# EAGLE board main1 (EAGLE 7.5.0)
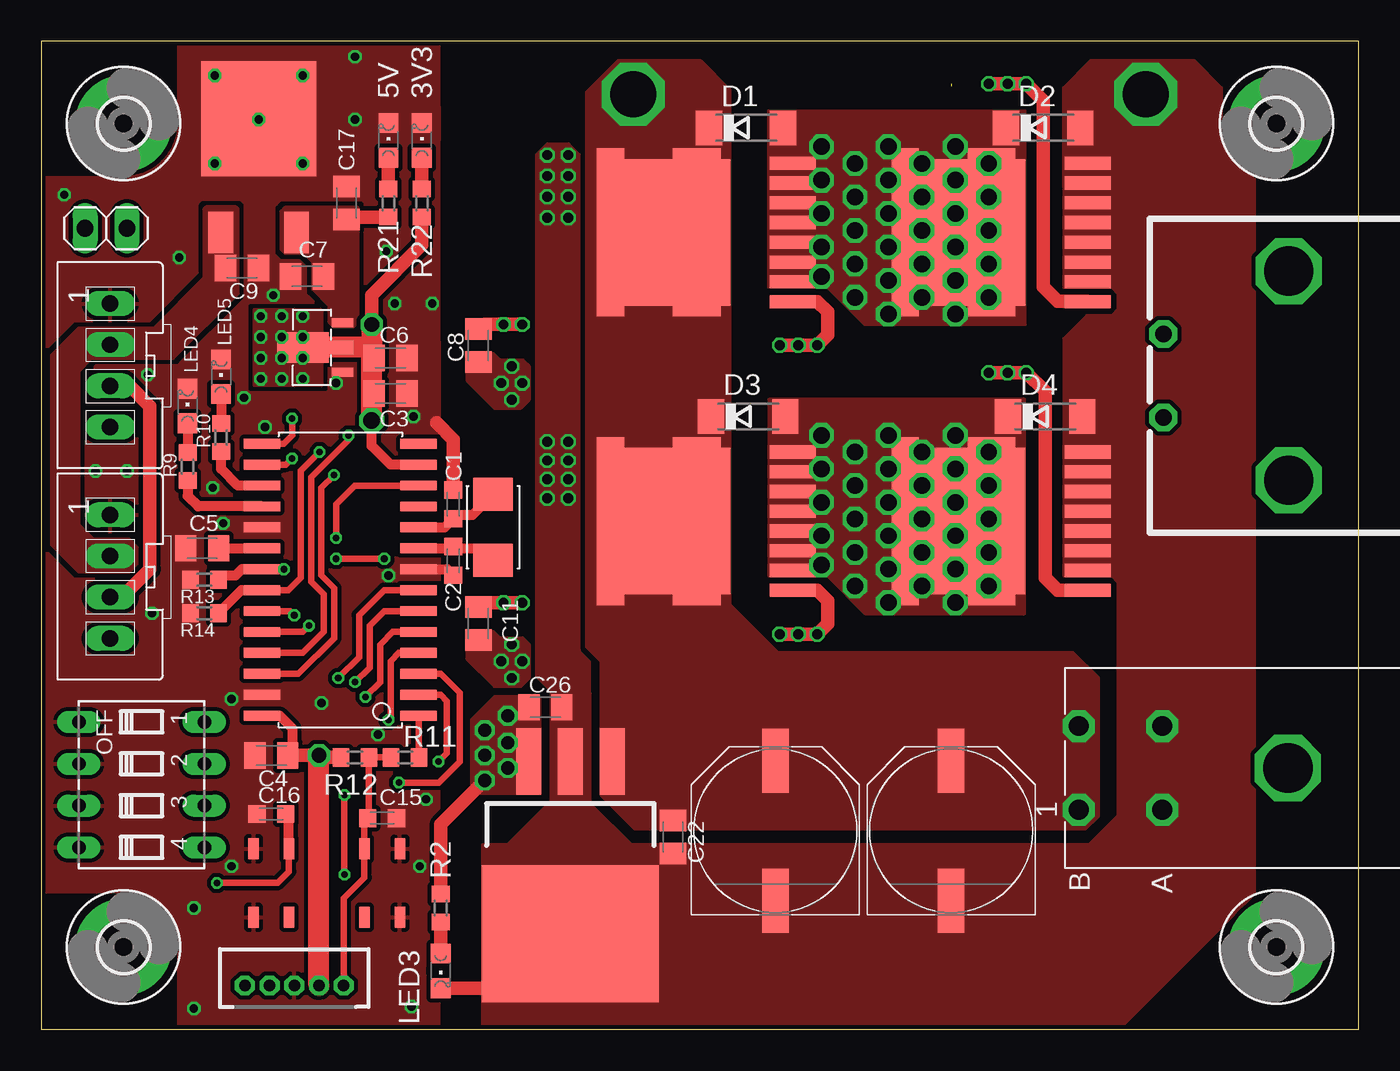
[diagram p0: board, top side]
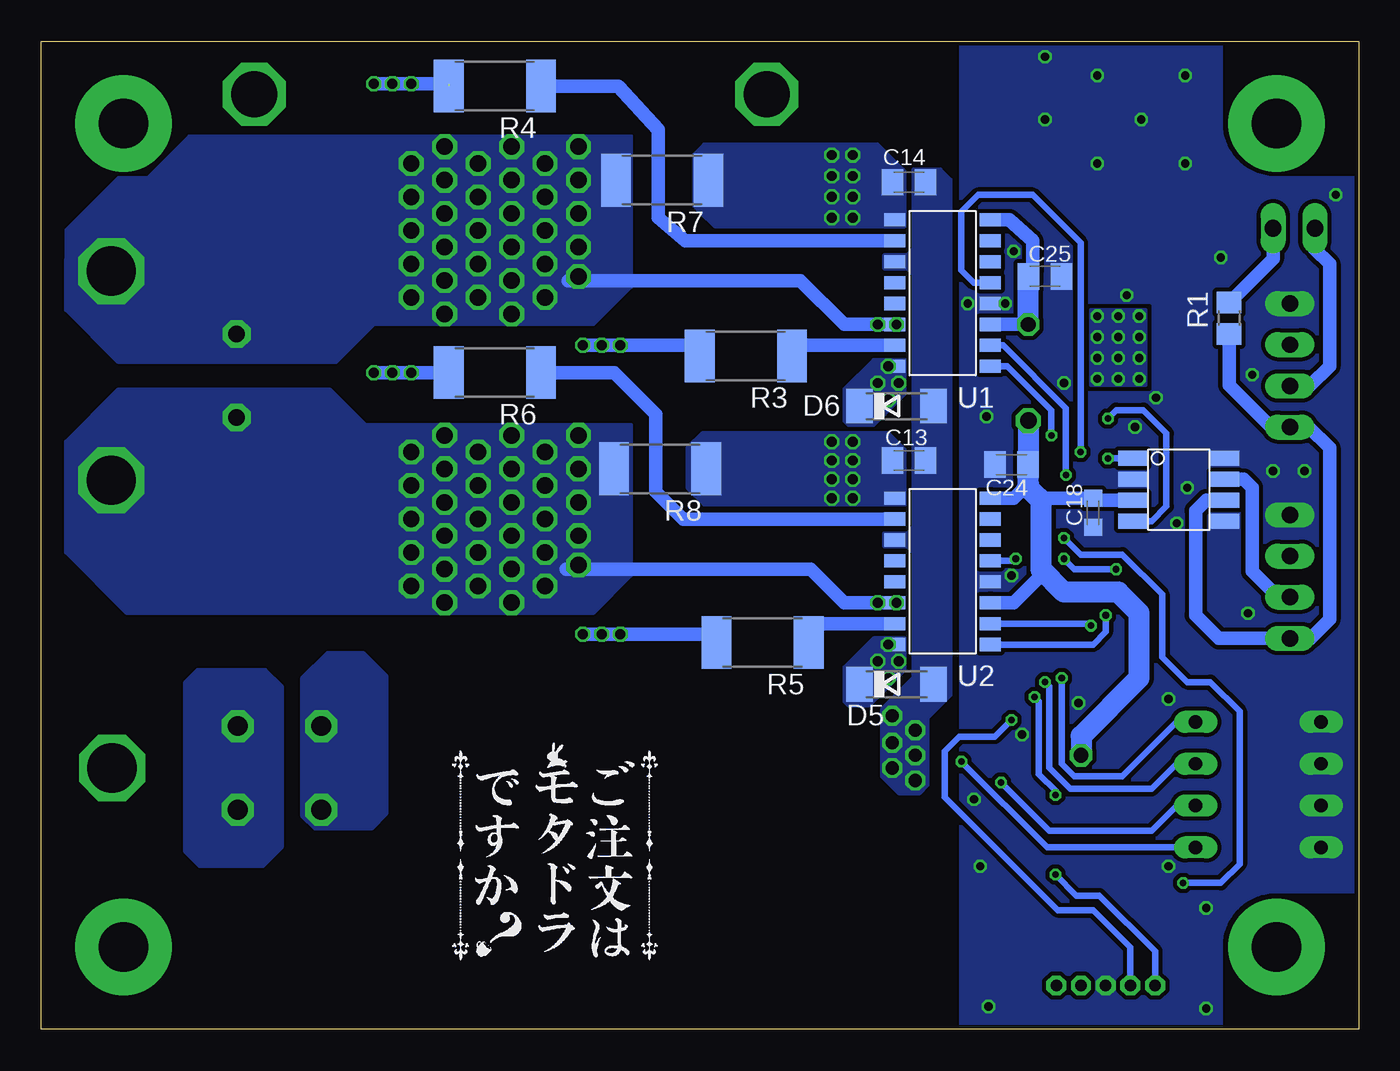
[diagram p1: board, bottom side, seen from below]

Size 80 x 60 mm. Coordinates in mm from the lower left corner, seen from the top.
Outline: 0,0 80,0 80,60 0,60 0,0
Copper layers (1*16): Top 0.035mm / dielectric 1.5mm / Bottom 0.035mm
Design rules "Elecrow_2-layer_eagle_rule": minimum track width 6mil, minimum drill 12mil, track to track 6mil, track to pad 6mil, pad to pad 6mil, via to via 6mil, smd to smd 0mil, copper to edge 10mil, drill to drill 10mil, minimum pad ring 10mil, minimum via ring 6mil, stop-mask expansion 2mil, vias tented up to drill 100mil, thermal gap 10mil
tRestrict: 19 lines
bRestrict: 10 lines

## Footprints (pad centres in the part's own frame; a part is rotated, then mirrored left to right if it is on the bottom)
CHIPLED_0805 = smd 1.2 x 1.2: A 0,-1.05; C 0,1.05
C0603K = smd 1.05 x 1.08: 1 -0.875,0; 2 0.875,0
C0805K = smd 1.3 x 1.6: 1 -1,0; 2 1,0
PANASONIC_G = smd 3.9 x 1.6: + 4.25,0; - -4.25,0
XA04 = drill 1 long: PIN1 0,0; PIN2 -2.5,0; PIN3 -5,0; PIN4 -7.5,0
SOD106-R = smd 1.6 x 2.1: A 2.25,0; C -2.25,0
3,0-PAD = drill 3 pad 5.842: B3,0 0,0
SOIC28 = smd 0.6 x 2.2: 1 -8.255,-4.75; 2 -6.985,-4.75; 3 -5.715,-4.75; 4 -4.445,-4.75; 5 -3.175,-4.75; 6 -1.905,-4.75; 7 -0.635,-4.75; 8 0.635,-4.75; 9 1.905,-4.75; 10 3.175,-4.75; 11 4.445,-4.75; 12 5.715,-4.75; 13 6.985,-4.75; 14 8.255,-4.75; 15 8.255,4.75; 16 6.985,4.75; 17 5.715,4.75; 18 4.445,4.75; 19 3.175,4.75; 20 1.905,4.75; 21 0.635,4.75; 22 -0.635,4.75; 23 -1.905,4.75; 24 -3.175,4.75; 25 -4.445,4.75; 26 -5.715,4.75; 27 -6.985,4.75; 28 -8.255,4.75
TO-252-2 = smd 1.5 x 2.5: 1 -2.3,0; 3 2.3,0 | smd 7 x 7: 2 0,6.9
SOT89 = smd 0.55 x 1.3: 1 -1.5,0; 3 1.5,0 | smd 0.8 x 1.475: 2 0,0.087 | smd 1.85 x 3.125: P 0,2.388
1X02 = drill 1.016 long: 1 -1.27,0; 2 1.27,0
TO-263-3 = smd 1.524 x 4.039: 1 -2.54,0; 2 0,0; 3 2.54,0 | smd 10.744 x 8.306: 4 0,10.452
NX5032GA = smd 2 x 2.4: 1 -2,0; 2 2,0
R0805 = smd 1.3 x 1.5: 1 -0.95,0; 2 0.95,0
R0603 = smd 1 x 1.1: 1 -0.85,0; 2 0.85,0
R2512 = smd 1.8 x 3.2: 1 -2.8,0; 2 2.8,0
DIP04S = drill 0.813 long: 1 -3.81,-3.81; 2 -1.27,-3.81; 3 1.27,-3.81; 4 3.81,-3.81; 5 3.81,3.81; 6 1.27,3.81; 7 -1.27,3.81; 8 -3.81,3.81
SKRP = smd 1.27 x 0.635: 1 -2.075,1.075; 2 2.075,1.075; 3 -2.075,-1.075; 4 2.075,-1.075
SOIC16_N = smd 0.8 x 1.27: P$1 -4.445,-2.9; P$2 -3.175,-2.9; P$3 -1.905,-2.9; P$4 -0.635,-2.9; P$5 0.635,-2.9; P$6 1.905,-2.9; P$7 3.175,-2.9; P$8 4.445,-2.9; P$9 4.445,2.9; P$10 3.175,2.9; P$11 1.905,2.9; P$12 0.635,2.9; P$13 -0.635,2.9; P$14 -1.905,2.9; P$15 -3.175,2.9; P$16 -4.445,2.9
D-3500D04 = drill 1.2 pad 1.93 octagon: 01A -2.54,-5.08; 01B -2.54,0; 02A 2.54,-5.08; 02B 2.54,0 | drill 3 pad 4 octagon: P$1 0,-12.7
MO-299A = smd 0.8 x 2.8: 1 -4.2,-5.24; 2 -3,-5.24; 3 -1.8,-5.24; 4 -0.6,-5.24; 5 0.6,-5.24; 6 1.8,-5.24; 7 3,-5.24; 8 4.2,-5.24 | smd 8.9 x 0.6: PAD1 0,-1.16 | smd 10.2 x 2.9: PAD2 0,0.59 | smd 8.9 x 2.95: PAD3 0,3.515 | smd 10.2 x 1.65: PAD4 0,5.824
SOIC8 = smd 0.9 x 1.75: 1 -1.905,-2.8; 2 -0.635,-2.8; 3 0.635,-2.8; 4 1.905,-2.8; 5 1.905,2.8; 6 0.635,2.8; 7 -0.635,2.8; 8 -1.905,2.8
ZH05 = drill 0.7 octagon: 1 3,0; 2 1.5,0; 3 0,0; 4 -1.5,0; 5 -3,0
D-3200S02-S = drill 1 pad 1.676 octagon: 1 -2.6,21.28; 2 2.48,21.28 | drill 3 pad 4 octagon: P$1 -6.41,13.66; P$2 6.29,13.66

## Placement (x,y rotation side)
3V3  [CHIPLED_0805]  23.11,53.98 0 top
5V  [CHIPLED_0805]  21.08,53.98 0 top
C1  22p  [C0603K]  25.02,31.88 270 top
C2  22p  [C0603K]  25.02,28.45 90 top
C3  0.1u  [C0805K]  21.21,38.61 0 top
C4  0.1u  [C0805K]  13.97,16.64 180 top
C5  4.7u  [C0805K]  9.78,29.21 180 top
C6  4.7u  [C0805K]  21.21,40.77 180 top
C7  4.7u  [C0805K]  16.13,45.72 0 top
C8  4.7u  [C0805K]  26.54,41.53 90 top
C9  4.7u  [C0805K]  12.19,46.23 180 top
C11  4.7u  [C0805K]  26.54,24.64 90 top
C12  [PANASONIC_G]  55.24,12.06 90 top
C13  0.1u  [C0805K]  27.3,34.54 180 bottom
C14  0.1u  [C0805K]  27.3,51.44 180 bottom
C15  0.1u  [C0603K]  20.7,12.83 0 top
C16  0.1u  [C0603K]  13.97,13.08 0 top
C17  4.7u  [C0805K]  18.54,50.16 270 top
C18  0.1u  [C0603K]  16.13,31.37 90 bottom
C21  [PANASONIC_G]  44.58,12.06 90 top
C22  4.7u  [C0805K]  38.35,11.68 270 top
C24  0.1u  [C0805K]  21.08,34.29 180 bottom
C25  0.1u  [C0805K]  19.05,45.72 0 bottom
C26  4.7u  [C0805K]  30.61,19.56 0 top
CN2  XA04-T  [XA04]  4.19,44.07 90 top
CN3  XA04-T  [XA04]  4.19,31.24 90 top
D1  SBD  [SOD106-R]  42.8,54.74 0 top
D2  SBD  [SOD106-R]  60.83,54.74 0 top
D3  SBD  [SOD106-R]  42.93,37.21 0 top
D4  SBD  [SOD106-R]  60.96,37.21 0 top
D5  [SOD106-R]  28.07,20.95 0 bottom
D6  [SOD106-R]  28.07,37.85 0 bottom
H5  MOUNT-PAD-ROUND3.0  [3,0-PAD]  5,55 0 top
H6  MOUNT-PAD-ROUND3.0  [3,0-PAD]  5,5 0 top
H7  MOUNT-PAD-ROUND3.0  [3,0-PAD]  75,55 0 top
H8  MOUNT-PAD-ROUND3.0  [3,0-PAD]  75,5 0 top
IC1  DSPIC33FJ32MC302/64MC202/64MC802/128MC202/128MC802  [SOIC28]  18.16,27.3 90 top
IC2  REGULATERNJM2845DL1  [TO-252-2]  13.21,48.39 0 top
IC4  REGULATERAZ1117CR  [SOT89]  18.29,41.4 90 top
JP3  [1X02]  3.94,48.64 180 top
LED3  [CHIPLED_0805]  24.26,3.56 180 top
LED4  [CHIPLED_0805]  8.89,37.85 0 top
LED5  [CHIPLED_0805]  10.92,39.62 0 top
MC7812BDTRKGOSCT-ND1  REGULATERMIC2940A-5.0WU  [TO-263-3]  32.13,16.26 180 top
Q2  CRYSTALNX5032GA  [NX5032GA]  27.43,30.48 270 top
R1  120  [R0805]  7.87,43.18 90 bottom
R2  1k  [R0603]  24.26,7.37 90 top
R3  33  [R2512]  37.21,40.89 180 bottom
R4  33  [R2512]  52.45,57.28 180 bottom
R5  33  [R2512]  36.2,23.5 180 bottom
R6  33  [R2512]  52.45,39.88 180 bottom
R7  470  [R2512]  42.29,51.56 180 bottom
R8  470  [R2512]  42.42,34.04 180 bottom
R9  510  [R0603]  8.89,34.16 90 top
R10  510  [R0603]  10.92,35.94 90 top
R11  330  [R0603]  22.1,16.51 0 top
R12  1k  [R0603]  19.05,16.51 180 top
R13  510  [R0603]  9.91,27.3 180 top
R14  510  [R0603]  9.91,25.27 180 top
R21  510  [R0603]  21.08,50.16 90 top
R22  510  [R0603]  23.11,50.16 90 top
S2  [DIP04S]  6.1,14.86 270 top
SW1  SWITCH_4PALPS  [SKRP]  20.7,8.89 270 top
SW2  SWITCH_4PALPS  [SKRP]  13.97,8.89 270 top
U1  [SOIC16_N]  25.27,44.7 90 bottom
U2  [SOIC16_N]  25.27,27.81 90 bottom
U$1  CN-D3500D04  [D-3500D04]  62.99,15.88 90 top
U$2  FET_NCHFDBL0065N40  [MO-299A]  40.39,48.39 90 top
U$3  FET_NCHFDBL0065N40  [MO-299A]  58.29,48.39 90 top
U$4  FET_NCHFDBL0065N40  [MO-299A]  40.39,30.86 90 top
U$5  FET_NCHFDBL0065N40  [MO-299A]  58.29,30.86 90 top
U$6  MAX3051  [SOIC8]  10.92,32.77 270 bottom
U$7  WRITE_FOR_PICT  [ZH05]  15.37,2.67 0 top
U$8  LOGOGOCHIUSA-14MM  [LOGO006]  55.24,3.81 0 bottom
U$9  CN-D3200S02  [D-3200S02-S]  89.41,39.75 90 top

## Library data of the parts
3V3 5V LED3-LED5 = led
C1-C9 C11 C13-C18 C22 C24-C26 = rp_c
C12 C21 = rcl
CN2 CN3 = rp_cn_xa
D1-D6 = diode
H5-H8 = holes
IC1 IC2 IC4 MC7812BDTRKGOSCT-ND1 Q2 SW1 SW2 U$1-U$9 = Syohei
JP3 = pinhead-2
R1-R14 R21 R22 = rp_r
S2 = switch-dil; OC_FARNELL: unknown; OC_NEWARK: unknown
U1 U2 = IC_module

## Nets
0V: C12.- C13.2 C14.2 C21.- C22.2 C26.2 D2.A D4.A LED3.C MC7812BDTRKGOSCT-ND1.2 MC7812BDTRKGOSCT-ND1.4 R7.1 R8.1 U1.P$9 U2.P$9 U$1.01A U$1.02A U$3.2 U$3.3 U$3.4 U$3.5 U$3.6 U$3.7 U$3.8 U$5.2 U$5.3 U$5.4 U$5.5 U$5.6 U$5.7 U$5.8
3.3V: C3.1 C4.1 C6.2 C18.2 C24.1 C25.1 IC1.13 IC1.28 IC4.2 IC4.P R12.2 R22.1 U1.P$3 U1.P$8 U2.P$3 U2.P$8 U$6.3 U$7.2
+5V: C7.2 C17.2 IC2.3 IC4.3 R21.1
+10V: C9.2 CN2.PIN2 CN3.PIN2 IC2.1
BOOTA: C8.1 D6.C U1.P$16
BOOTB: C11.1 D5.C U2.P$16
CANH: CN2.PIN3 CN3.PIN3 JP3.2 U$6.7
CANL: CN2.PIN4 CN3.PIN4 R1.1 U$6.6
CRXD: IC1.15 U$6.4
CTXD: IC1.16 U$6.1
DGND: 3V3.C 5V.C C1.1 C2.1 C3.2 C4.2 C5.2 C6.1 C7.1 C9.1 C15.2 C16.1 C17.1 C18.1 C24.2 C25.2 CN2.PIN1 CN3.PIN1 IC1.8 IC1.19 IC1.27 IC2.2 IC4.1 LED4.C LED5.C R13.2 R14.2 S2.1 S2.2 S2.3 S2.4 SW1.1 SW1.2 SW2.3 SW2.4 U1.P$4 U2.P$4 U$6.2 U$6.5 U$6.8 U$7.3
DIS_A: IC1.22 R14.1 U1.P$5
DIS_B: IC1.21 R13.1 U2.P$5
HA: R3.1 U1.P$15
HB: R5.1 U2.P$15
LA: R4.1 U1.P$10
LB: R6.1 U2.P$10
LED0: IC1.18 R9.1
LED1: IC1.17 R10.1
MCLR: C15.1 R11.1 R12.1 SW1.3 U$7.1
N$1: C2.2 IC1.9 Q2.2
N$2: C1.2 IC1.10 Q2.1
N$3: C5.1 IC1.20
N$4: JP3.1 R1.2
N$5: LED3.A R2.1
N$6: LED4.A R9.2
N$7: LED5.A R10.2
N$8: R3.2 U$2.1
N$9: R4.2 U$3.1
N$13: R6.2 U$5.1
N$15: R5.2 U$4.1
N$17: IC1.1 R11.2
N$21: 5V.A R21.2
N$22: 3V3.A R22.2
OUT+: C8.2 D1.A D2.C R7.2 U1.P$14 U$2.2 U$2.3 U$2.4 U$2.5 U$2.6 U$2.7 U$2.8 U$3.PAD1 U$3.PAD2 U$3.PAD3 U$3.PAD4 U$9.2 U$9.P$2
OUT-: C11.2 D3.A D4.C R8.2 U2.P$14 U$4.2 U$4.3 U$4.4 U$4.5 U$4.6 U$4.7 U$4.8 U$5.PAD1 U$5.PAD2 U$5.PAD3 U$5.PAD4 U$9.1 U$9.P$1
PGEC: IC1.5 U$7.5
PGED: IC1.4 U$7.4
PWMHA: IC1.25 U1.P$1
PWMHB: IC1.23 U2.P$1
PWMLA: IC1.26 U1.P$2
PWMLB: IC1.24 U2.P$2
SW: C16.2 IC1.12 SW2.1
SW0: IC1.7 S2.8
SW1: IC1.6 S2.7
SW2: IC1.3 S2.6
SW3: IC1.2 S2.5
VCC_1: C13.1 C14.1 C26.1 D5.A D6.A MC7812BDTRKGOSCT-ND1.3 R2.2 U1.P$11 U2.P$11
VDD: C12.+ C21.+ C22.1 D1.C D3.C MC7812BDTRKGOSCT-ND1.1 U$1.01B U$1.02B U$2.PAD1 U$2.PAD2 U$2.PAD3 U$2.PAD4 U$4.PAD1 U$4.PAD2 U$4.PAD3 U$4.PAD4

## Tracks (layer width: path | path; a pad name or v marks a point on that pad's centre or on a via)
0V  (via drill 0.6, 2.8)
  Top 0.813: LED3.C 27.91,2.51 28.07,2.67
  other vias: 67.06,56.77 30.73,32.26 32,32.26 30.73,33.4 32,33.4 32,34.54 30.73,34.54 30.73,49.28 32,49.28 32,50.55 30.73,50.55 32,51.82 30.73,51.82 30.73,35.69 32,35.69 30.73,53.09 32,53.09
  pour Top (isolate 0.254, rank 5, no thermals): 63.63,11.18 26.8,11.18 26.8,0 65.41,0 73.66,8.26 73.66,51.56 69.34,55.88 62.1,55.88 62.1,45.09 65.02,45.09 65.41,44.7 65.41,43.69 65.02,43.31 63.5,43.31 62.1,41.91 62.1,27.56 65.02,27.56 65.41,27.18 65.41,12.95
  pour Top (isolate 0.254, rank 4, no thermals): 30.99,20.45 33.27,20.45 33.27,13.72 35.94,11.05 28.19,11.05 30.99,13.84
  pour Top (isolate 0.254, rank 4, no thermals): 62.1,57.15 63.75,58.8 69.98,58.8 71.63,57.15 71.63,51.82 62.1,51.18
  pour Top (isolate 0.254, rank 6, no thermals): 33.27,19.68 33.27,22.35 32.64,22.99 32.64,53.09 32,53.72 30.73,53.72 30.1,53.09 30.1,21.46 30.99,20.57 30.99,19.56
  pour Bottom (isolate 0.254, rank 6, no thermals): 27.69,52.2 29.21,53.72 39.37,53.72 39.75,53.72 40.39,53.09 40.39,50.04 40.01,49.66 39.12,48.77 27.56,48.77 27.56,52.07
  pour Bottom (isolate 0.254, rank 6, no thermals): 27.56,35.18 28.57,36.2 39.88,36.2 40.77,35.31 40.77,32.89 39.75,31.88 27.56,31.88
  pour Bottom (isolate 0.254, rank 4, no thermals): 65.41,11.05 66.55,9.91 70.36,9.91 71.25,10.79 71.25,21.08 70.48,21.84 66.42,21.84 65.41,20.83
3.3V  (via drill 0.5, 0.9, 1)
  Top 0.254: IC4.P 16.64,41.4 IC4.2
  Top 0.406: 16.91,16.6 16.99,16.51
  Top 0.61: IC1.28 14.48,19.05 15.24,18.29 15.24,16.91 C4.1 | IC1.13 21.21,34.29 20.07,35.43 v20.07,36.96
  Top 0.813: 16.91,16.6 v16.87,16.64 C4.1 | C6.2 20.07,39.88 | C3.1 20.07,37.85 | 16.99,16.51 R12.2 | R22.1 23.11,47.62 20.07,44.58 v20.07,42.8
  Top 1.27: U$7.2 v16.87,16.64 | v20.07,36.96 20.07,37.85 20.07,39.88 20.07,41.4 | 20.07,41.4 16.64,41.4 | v20.07,42.8 20.07,41.4
  Bottom 0.813: U2.P$8 20.95,32.26 20.07,33.15 | U1.P$8 21.21,49.15 20.07,48.13 19.81,47.88 19.81,45.96 C25.1 20.07,45.48 | U1.P$3 v20.07,42.8 | U2.P$3 20.95,25.91 19.43,27.43 19.43,27.91 19.29,27.92 | C24.1 20.08,34.91 20.07,34.92 | 20.07,35.18 20.07,35.05 | 15.69,32.13 C18.2 | 19.43,32.26 19.37,32.32 19.3,32.24 C18.2 | U$6.3 16.13,32.13 C18.2
  Bottom 1.27: 20.07,35.05 20.07,34.92 20.07,33.15 20.07,32.89 19.43,32.26 19.29,32.12 19.29,27.92 17.91,26.54 14.61,26.54 13.34,25.27 13.34,21.34 16.87,17.8 v16.87,16.64 | v20.07,36.96 20.07,35.18 | v20.07,42.8 20.07,45.48 20.07,45.7 C25.1
  other vias: 13.34,43.31 13.34,42.04 13.34,40.77 13.34,39.5 14.61,43.31 15.88,43.31 14.61,39.5 15.88,39.5 14.61,42.04 14.61,40.77 15.88,40.77 15.88,42.04
  pour Top (isolate 0.254, rank 5, no thermals): 17.02,39.12 12.95,39.12 12.95,43.69 17.02,43.69
  pour Bottom (isolate 0.254, rank 5, no thermals): 12.95,39.12 16.26,39.12 16.26,43.69 12.95,43.69
+5V
  Top 0.813: R21.1 18.69,49.31 C17.2
  pour Top (isolate 0.254, rank 4, no thermals): 14.86,49.91 19.18,49.91 19.18,42.93 18.92,42.67 17.78,42.67 17.53,42.93 17.53,43.94 16.51,44.96 16.51,46.61 16,47.12 14.86,47.12 14.61,47.37 14.61,49.66
+10V
  pour Top (isolate 0.254, rank 4, no thermals): 0.64,29.46 2.29,27.81 5.33,27.81 5.84,28.32 5.84,29.21 5.33,29.72 3.17,29.72 2.29,30.61 2.29,40.01 3.05,40.77 5.08,40.77 5.08,42.55 2.29,42.55 0.64,40.89
  pour Top (isolate 0.254, rank 4, no thermals): 4.83,40.77 8,40.77 11.94,44.7 11.94,49.78 11.81,49.91 10.03,49.91 9.91,49.78 9.91,45.59 6.86,42.55 4.83,42.55
BOOTA  (via drill 0.6)
  other vias: 28.57,38.23 27.94,39.24 29.21,39.24 28.57,40.26
  pour Top (isolate 0.254, rank 4, no thermals): 25.91,41.02 27.43,41.02 27.81,40.64 29.21,40.64 29.59,40.26 29.59,38.23 29.08,37.72 27.56,37.72 25.91,39.37
  pour Bottom (isolate 0.254, rank 4, no thermals): 27.56,40.64 29.46,40.64 31.24,38.86 31.24,36.96 30.99,36.7 29.46,36.7 27.56,38.61
BOOTB  (via drill 0.6)
  other vias: 28.57,23.37 29.21,22.35 28.57,21.34 27.94,22.35
  pour Bottom (isolate 0.254, rank 4, no thermals): 27.56,23.75 29.46,23.75 31.24,21.97 31.24,19.94 30.99,19.68 29.72,19.68 27.56,21.84
  pour Top (isolate 0.254, rank 4, no thermals): 25.91,24.13 27.43,24.13 27.81,23.75 29.21,23.75 29.59,23.37 29.59,21.34 29.08,20.83 27.56,20.83 25.91,22.48
CANH
  Top 0.813: CN2.PIN3 5.38,39.07 6.6,37.85 6.6,27.94 4.95,26.29 arc-45 4.84,26.24 CN3.PIN3
  Bottom 0.813: JP3.2 2.67,47.37 1.78,46.48 1.78,40.26 2.97,39.07 CN2.PIN3 | CN3.PIN3 4.91,26.24 6.48,27.81 6.48,32.89 6.99,33.4 U$6.7
CANL
  Bottom 0.813: R1.1 7.87,39.12 5.33,36.57 CN2.PIN4 3.04,36.57 1.78,35.31 1.78,24.89 2.92,23.75 CN3.PIN4 8.5,23.74 9.91,25.15 9.91,31.5 9.27,32.13 U$6.6
CRXD  (via drill 0.4)
  Top 0.406: IC1.15 14.73,35.56 15.24,36.07 v15.24,37.08
  Bottom 0.406: v15.24,37.08 14.73,37.59 13.08,37.59 11.68,36.2 11.68,31.75 12.57,30.86 U$6.4
CTXD  (via drill 0.4)
  Top 0.406: IC1.16 14.86,34.29 v15.24,34.67
  Bottom 0.406: v15.24,34.67 U$6.1
DGND  (via drill 0.5)
  Top 0.61: IC1.8 24.65,27.94 C2.1
  Top 0.813: C1.1 25.02,35.81 24,36.83
  other vias: 17.91,39.24 20.95,47.24 13.21,55.24 10.54,52.58 10.54,57.91 15.88,57.91 15.88,52.58 17.02,19.81 21.08,27.56 3.3,33.91 5.21,33.91 22.48,1.4 9.27,1.27 1.4,50.67 11.05,30.73 12.32,38.35 22.61,37.21 13.59,36.58 10.41,32.89 21.46,44.07 6.73,25.27 23.75,44.07 19.05,55.24 19.05,59.05 8.38,46.86 11.56,20.07 11.56,9.91 23.37,13.97 20.45,17.91 22.99,9.91 9.27,7.37 6.48,39.75 14.1,44.58
  pour Bottom (isolate 0.254, rank 6, no thermals): 0,0 24.13,0 24.13,19.94 24.13,60.07 0,60.07
  pour Top (isolate 0.254, rank 6): 0,0 24.13,0 24.13,2.29 24.13,60.07 0,60.07
  pour Top (isolate 0.254, rank 6, no thermals): 11.68,21.34 15.37,21.34 15.49,19.3 11.81,19.3
  pour Top (isolate 0.254, rank 6, no thermals): 11.43,31.5 15.11,31.5 15.11,29.46 11.56,29.46
  pour Top (isolate 0.254, rank 6, no thermals): 19.94,38.86 16.26,38.86 16.26,40.89 19.94,40.89
  pour Top (isolate 0.254, rank 6, no thermals): 24.13,26.92 20.19,26.92 20.19,28.96 24.13,28.96
  pour Top (isolate 0.254, rank 6, no thermals): 16.26,44.32 12.06,44.32 12.06,47.24 16.26,47.24
  pour Top (isolate 0.254, rank 6, no thermals): 10.41,30.61 10.41,24 6.86,24 6.86,30.61
  pour Top (isolate 0.254, rank 6, no thermals): 24.13,41.78 24.13,35.18 20.57,35.18 20.57,41.78
  pour Top (isolate 0.254, rank 6, no thermals): 17.91,57.15 17.91,53.47 15.88,53.47 15.88,57.15
  pour Top (isolate 0.254, rank 6, no thermals): 11.43,52.58 15.11,52.58 15.11,50.55 11.43,50.55
  pour Top (isolate 0.254, rank 6, no thermals): 8.64,51.31 8.64,59.18 17.14,59.18 17.14,51.31
  pour Top (isolate 0.254, rank 6, no thermals): 15.11,57.53 11.43,57.53 11.43,59.56 15.11,59.56
  pour Top (isolate 0.254, rank 6, no thermals): 24.13,53.98 20.07,53.98 20.07,56.01 24.13,56.01
  pour Top (isolate 0.254, rank 6, no thermals): 19.94,50.16 17.14,50.16 17.14,52.45 19.94,52.45
  pour Top (isolate 0.254, rank 6, no thermals): 14.22,18.29 14.22,14.61 11.94,14.61 11.94,18.29
  pour Top (isolate 0.254, rank 6, no thermals): 14.1,15.75 14.1,12.06 11.81,12.06 11.81,15.75
  pour Top (isolate 0.254, rank 6, no thermals): 22.86,15.62 22.86,11.94 20.57,11.94 20.57,15.62
  pour Top (isolate 0.254, rank 6, no thermals): 6.99,40.26 10.67,40.26 10.67,37.97 6.99,37.97
  pour Top (isolate 0.254, rank 6, no thermals): 8.76,41.91 12.45,41.91 12.45,39.62 8.76,39.62
DIS_A  (via drill 0.4)
  Top 0.406: IC1.22 14.99,26.67 15.75,27.43 15.75,33.91 v16.89,35.05
  Top 0.61: R14.1 12.15,26.67 IC1.22
  Bottom 0.406: v16.89,35.05 16.89,47.75 19.81,50.67 23.11,50.67 24.13,49.66 24.13,46.1 23.37,45.34 U1.P$5
DIS_B  (via drill 0.4)
  Top 0.406: IC1.21 v14.73,27.94 | v17.91,28.57 v20.83,28.57
  Top 0.61: R13.1 11.01,27.56 11.81,27.56 12.19,27.94 IC1.21
  Bottom 0.406: v14.73,27.94 17.27,27.94 v17.91,28.57 | v20.83,28.57 20.95,28.45 U2.P$5
HA
  Bottom 0.813: U1.P$15 34.41,41.53 R3.1
HB
  Bottom 0.813: U2.P$15 33.4,24.64 R5.1
LA
  Bottom 0.813: R4.1 44.96,57.28 42.55,54.61 42.55,49.28 40.89,47.88 U1.P$10
LB
  Bottom 0.813: R6.1 45.21,39.88 42.67,37.34 42.67,32.64 41.02,30.99 U2.P$10
LED0
  Top 0.61: IC1.18 9.53,31.75 8.89,32.38 R9.1
LED1
  Top 0.61: IC1.17 11.94,33.02 10.92,34.04 R10.1
MCLR
  Top 0.406: U$7.1 18.37,7.95 19.63,9.21 SW1.3 19.63,12.63 C15.1 19.9,12.9 R12.1 R11.1
N$1
  Top 0.61: IC1.9 24.78,29.21 C2.2 25.26,29.21 26.92,29.21 27.43,28.7 Q2.2
N$2
  Top 0.61: IC1.10 24.5,30.48 C1.2 25.26,31.24 26.19,31.24 Q2.1
N$3
  Top 0.61: C5.1 IC1.20
N$4
  Bottom 0.813: JP3.1 5.21,46.8 R1.2
N$5
  Top 0.813: R2.1 LED3.A
N$6
  Top 0.61: LED4.A R9.2
N$7
  Top 0.61: LED5.A R10.2
N$8  (via drill 0.6)
  Top 0.813: U$2.1 47.13,44.19 47.75,43.56 47.75,42.16 v47.12,41.53 v45.97,41.53 v44.83,41.53
  Bottom 0.813: R3.2 40.01,41.53 v45.97,41.53 v47.12,41.53
N$9  (via drill 0.6)  (1 unrouted)
  Top 0.813: U$3.1 61.72,44.2 60.83,45.09 60.83,56.39 v59.82,57.4 v58.67,57.4 v57.53,57.4
  Bottom 0.813: 55.25,57.4 v57.53,57.4 v58.67,57.4 v59.82,57.4
N$13  (via drill 0.6)
  Top 0.813: U$5.1 61.72,26.67 60.96,27.43 60.96,38.73 v59.82,39.88 v57.53,39.88
  Bottom 0.813: v59.82,39.88 v58.67,39.88 v57.53,39.88 R6.2
N$15  (via drill 0.6)
  Top 0.813: U$4.1 47.13,26.66 47.75,26.04 47.75,24.64 v47.12,24 v45.97,24 v44.83,24
  Bottom 0.813: v47.12,24 v45.97,24 38.99,24 R5.2
N$17
  Top 0.406: R11.2 22.91,16.55 IC1.1
N$21
  Top 0.813: 5V.A R21.2
N$22
  Top 0.813: 3V3.A R22.2
OUT+  (via drill 0.6, 1)
  Top 0.813: C8.2 26.74,42.73 arc-45 26.92,42.8 v28.07,42.8 U1.P$14 v29.21,42.8
  Bottom 0.813: U1.P$14 28.7,42.8 v29.21,42.8 31.24,42.8 33.91,45.47 48.01,45.47
  other vias: 51.44,45.47 51.44,43.43 51.44,47.5 51.44,51.56 51.44,49.53 51.44,53.59 49.4,46.48 49.4,44.45 49.4,48.51 49.4,50.55 49.4,52.58 47.37,45.72 47.37,47.5 47.37,49.53 47.37,51.56 47.37,53.59 53.47,44.45 53.47,46.48 53.47,48.51 53.47,50.55 53.47,52.58 55.5,43.43 55.5,45.47 57.53,44.45 55.5,47.5 55.5,49.53 55.5,51.56 55.5,53.59 57.53,46.48 57.53,48.51 57.53,50.55 57.53,52.58
  pour Top (no thermals): 47.75,45.09 44.2,45.09 44.2,55.75 59.69,55.75 59.69,42.8 50.04,42.8
  pour Bottom (isolate 0.254, no thermals): 44.2,45.09 46.48,42.8 59.82,42.8 62.1,40.51 75.31,40.51 78.49,43.69 78.49,46.74 70.99,54.23 44.2,54.23
  pour Bottom: 72.9,51.69 75.31,51.69 78.49,48.51 78.49,43.69 73.03,43.69
OUT-  (via drill 0.6, 1)
  Top 0.813: C11.2 26.74,25.83 arc-45 26.92,25.91 v29.21,25.91
  Bottom 0.254: U2.P$14 v28.07,25.91
  Bottom 0.813: 48.13,27.94 33.27,27.94 31.24,25.91 v29.21,25.91 U2.P$14
  other vias: 51.44,25.91 51.44,27.94 51.44,29.97 51.44,32 51.44,34.04 51.44,36.07 49.4,26.92 49.4,28.96 49.4,30.99 49.4,35.05 49.4,33.02 47.37,29.97 47.37,28.19 47.37,32 47.37,34.04 47.37,36.07 53.47,35.05 53.47,33.02 53.47,30.99 53.47,28.96 53.47,26.92 55.5,25.91 55.5,27.94 57.53,26.92 55.5,29.97 55.5,32 55.5,34.04 55.5,36.07 57.53,28.96 57.53,30.99 57.53,33.02 57.53,35.05
  pour Top (no thermals): 44.2,27.56 47.75,27.56 50.04,25.27 59.69,25.27 59.69,38.23 44.2,38.23
  pour Bottom (isolate 0.254, no thermals): 44.2,27.56 46.48,25.27 74.8,25.27 78.49,28.96 78.49,35.69 75.31,38.86 62.48,38.86 60.33,36.7 44.2,36.7
PGEC  (via drill 0.4)
  Top 0.406: IC1.5 21.34,24.13 20.57,23.37 20.57,21.08 v19.68,20.19 | v18.41,14.22 v18.41,9.4
  Bottom 0.406: v18.41,9.4 17.14,8.13 15.75,8.13 12.37,4.75 U$7.5 | v18.41,14.22 18.41,14.48 19.43,15.49 19.43,19.94 v19.68,20.19
PGED  (via drill 0.4)
  Top 0.406: IC1.4 21.72,22.86 21.21,22.35 21.21,18.92 v21.08,18.8
  Bottom 0.406: v21.08,18.8 22.1,17.78 24.26,17.78 25.15,16.89 25.15,14.1 18.29,7.24 16.13,7.24 13.87,4.98 U$7.4
PWMHA  (via drill 0.4)
  Top 0.406: v18.67,36.07 18.67,35.81 16.38,33.53 16.38,27.18 17.14,26.42 17.14,24.13 15.88,22.86 IC1.25
  Bottom 0.406: U1.P$1 21.34,40.26 18.67,37.59 v18.67,36.07
PWMHB  (via drill 0.4)
  Top 0.406: IC1.23 15.11,25.4 v15.37,25.15
  Bottom 0.406: v15.37,25.15 15.37,24.13 16.13,23.37 U2.P$1
PWMLA  (via drill 0.4)
  Top 0.406: v17.78,33.66 17.02,32.89 17.02,27.56 17.78,26.8 17.78,23.75 15.62,21.59 IC1.26
  Bottom 0.406: v17.78,33.66 17.78,37.72 21.59,41.53 U1.P$2
PWMLB  (via drill 0.4)
  Top 0.406: IC1.24 15.88,24.13 v16.26,24.51
  Bottom 0.406: v16.26,24.51 16.38,24.64 U2.P$2
SW  (via drill 0.4)
  Top 0.406: v10.67,8.89 14.35,8.89 15.04,9.58 SW2.1 | IC1.12 19.05,33.02 17.91,31.88 v17.91,29.84
  Top 0.61: SW2.1 15.04,12.88 C16.2
  Bottom 0.406: v10.67,8.89 8.38,8.89 7.24,10.03 7.24,19.3 9.02,21.08 10.41,21.08 11.94,22.61 11.94,26.42 14.35,28.83 16.89,28.83 v17.91,29.84
SW0  (via drill 0.4)
  Top 0.406: IC1.7 20.83,26.67 19.3,25.15 19.3,22.61 v18.03,21.34
  Bottom 0.406: v18.03,21.34 18.03,16.13 17.27,15.37 14.35,15.37 11.05,18.67 S2.8
SW1  (via drill 0.4)
  Top 0.406: IC1.6 20.83,25.4 19.94,24.51 19.94,21.97 v19.05,21.08
  Bottom 0.406: v19.05,21.08 18.8,20.83 18.8,15.88 17.53,14.61 12.57,14.61 11.05,16.13 S2.7
SW2  (via drill 0.4)
  Top 0.406: IC1.3 24.26,21.59 25.4,20.45 25.4,16.26 24.13,14.99 v21.72,14.99
  Bottom 0.406: v21.72,14.99 18.8,12.06 12.57,12.06 11.05,13.59 S2.6
SW3  (via drill 0.4)
  Top 0.406: IC1.2 24.26,20.32 24.64,19.94 24.64,16.76 v24.13,16.26
  Bottom 0.406: S2.5 18.92,11.05 v24.13,16.26
VCC_1  (via drill 0.8)
  Top 0.813: R2.2 24.26,12.45 v26.92,15.11
  other vias: 28.32,19.05 26.92,16.64 26.92,18.16 28.32,15.88 28.32,17.4
  pour Top (isolate 0.254, rank 2, no thermals): 30.23,15.49 29.08,14.35 26.67,14.35 26.16,14.86 26.16,18.8 27.56,20.19 30.23,20.19
  pour Bottom (isolate 0.254, rank 4, no thermals): 28.96,19.43 28.96,15.37 27.94,14.35 26.67,14.35 26.16,14.86 26.16,18.92 24.77,20.32 24.77,51.56 25.4,52.2 27.05,52.2 27.05,47.37 27.43,46.99 28.83,46.99 28.83,46.23 27.43,46.23 27.05,45.85 27.05,30.48 27.43,30.1 28.83,30.1 28.83,29.34 27.43,29.34 27.05,28.96 27.05,21.34
VDD  (via drill 2.8)
  other vias: 35.94,56.77
  pour Top (isolate 0.254, no thermals): 63.37,12.19 36.07,12.19 34.04,14.22 34.04,22.35 33.15,23.24 33.15,56.9 35.05,58.8 40.01,58.8 41.78,57.02 41.78,25.78 44.7,22.86 62.61,22.86 64.14,21.34 64.14,12.95
  pour Bottom (isolate 0.254, rank 4, no thermals): 63.37,12.19 64.14,12.95 64.14,21.34 62.61,22.86 60.45,22.86 59.05,21.46 59.05,13.08 59.94,12.19